# Altium PCB RP_INTERFACE_BOARD_V4.1.PcbDoc
Units mm, origin at the board's own origin, x right, y up, seen from the top; angles counter-clockwise.
Board outline 100 x 100 mm, 2 copper layers (Top Layer, Bottom Layer); 87 components, 97 nets, 300 pads, 89 vias.
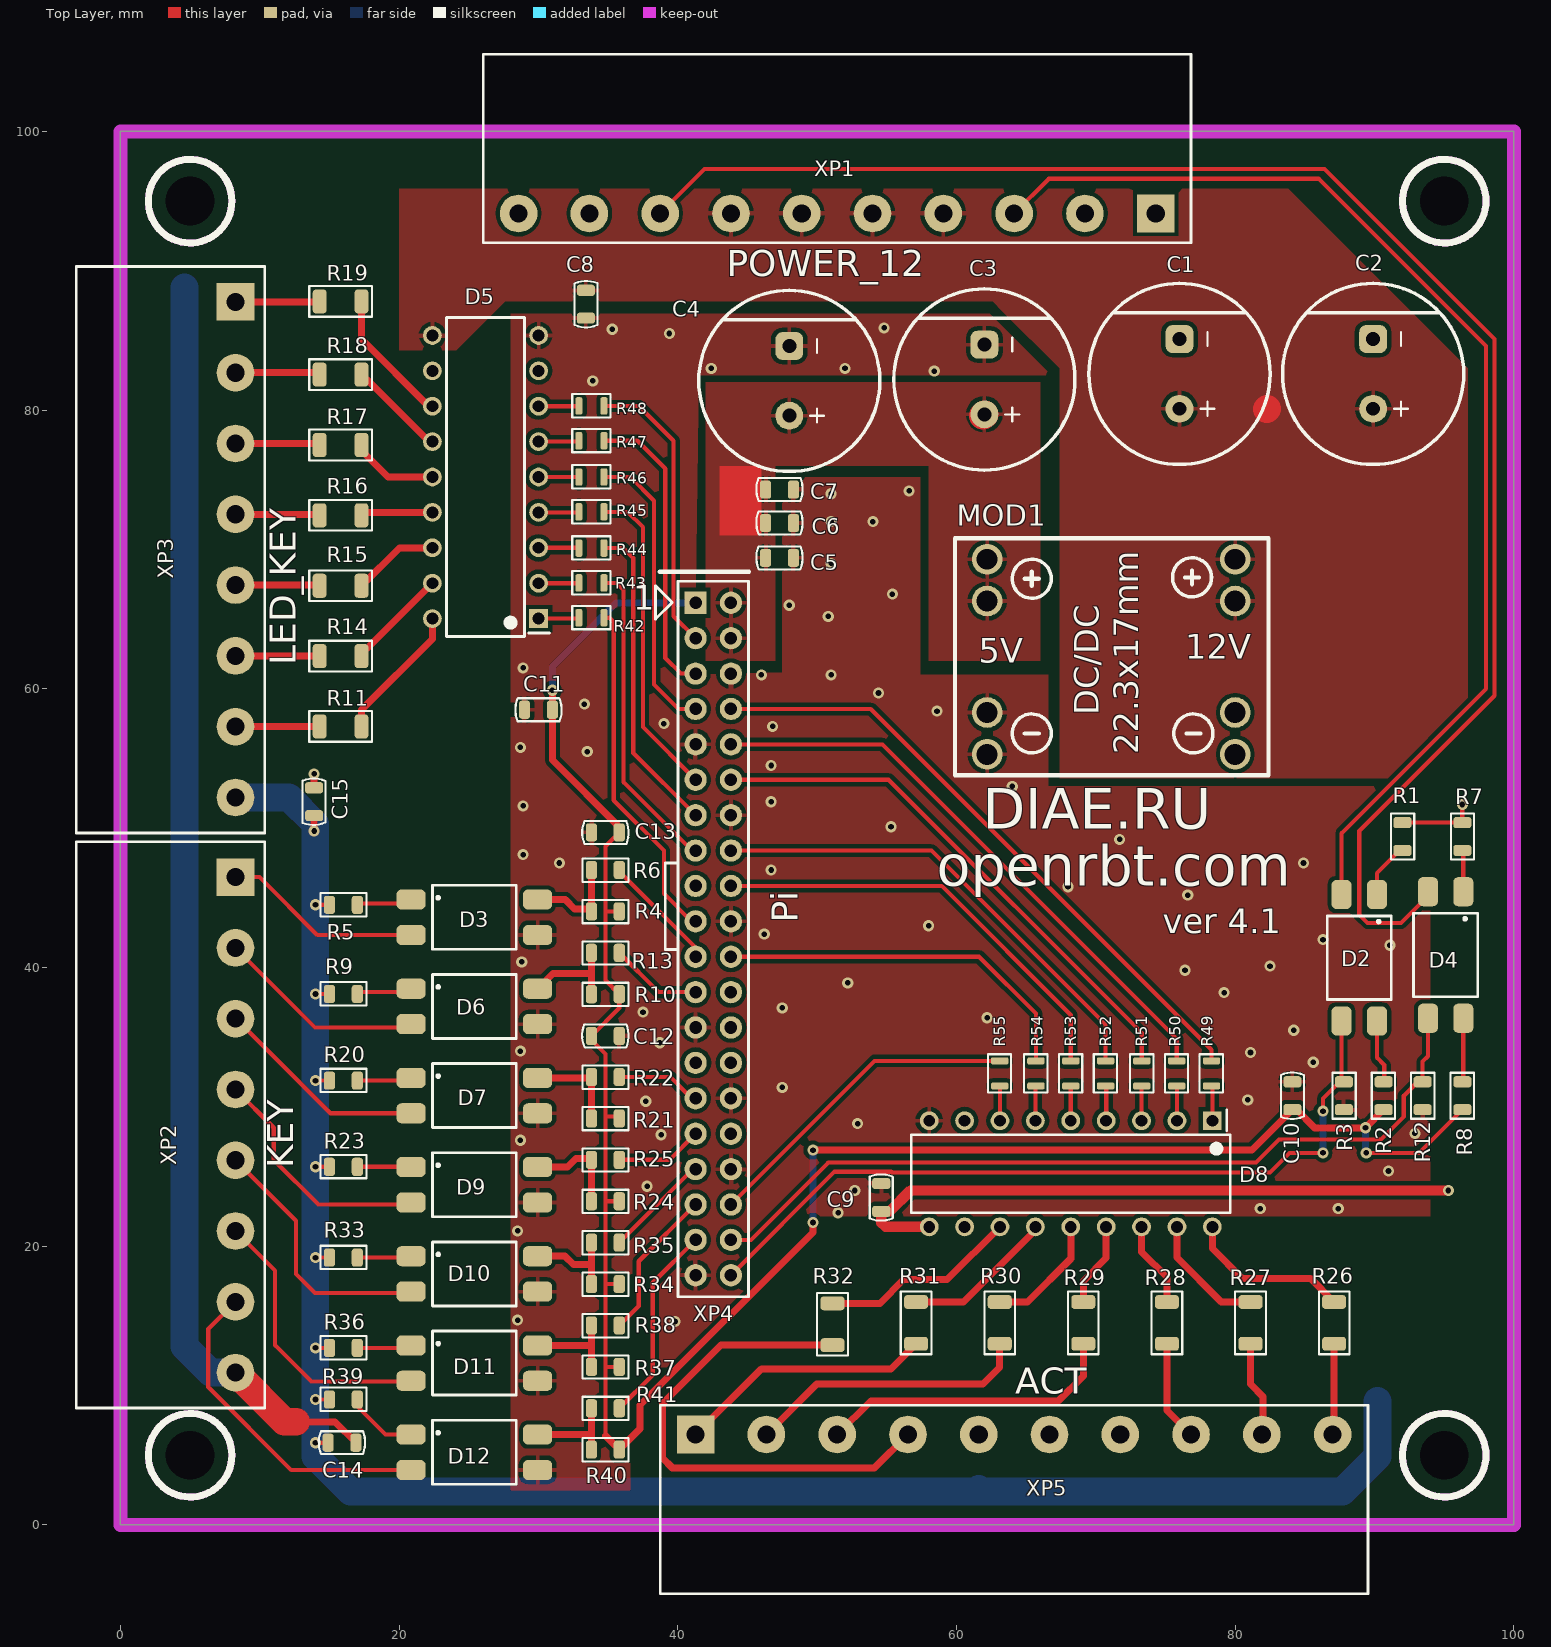
[diagram p0: Top Layer view]
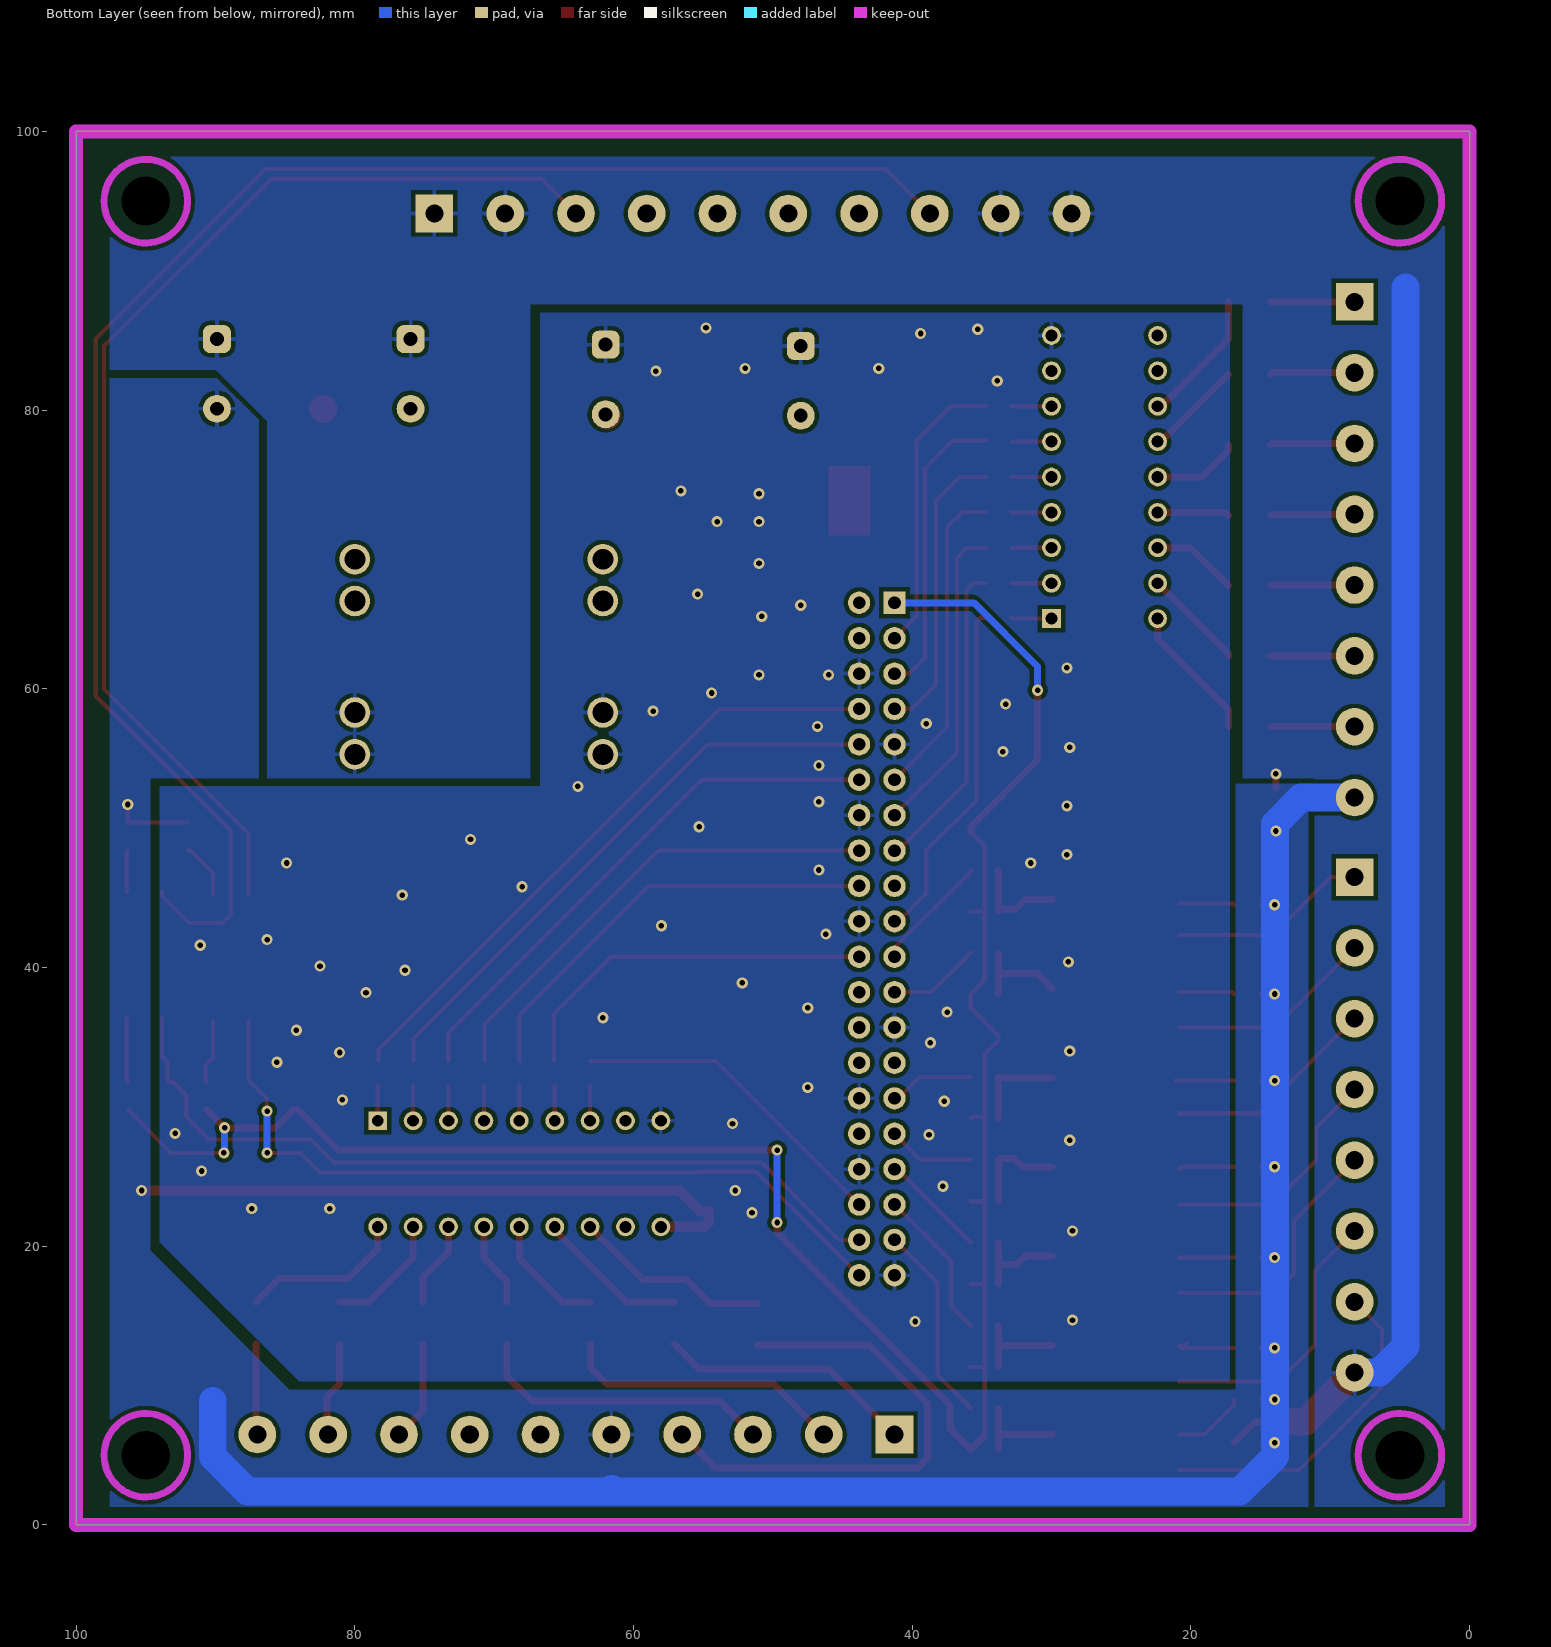
[diagram p1: Bottom Layer view, seen from below]
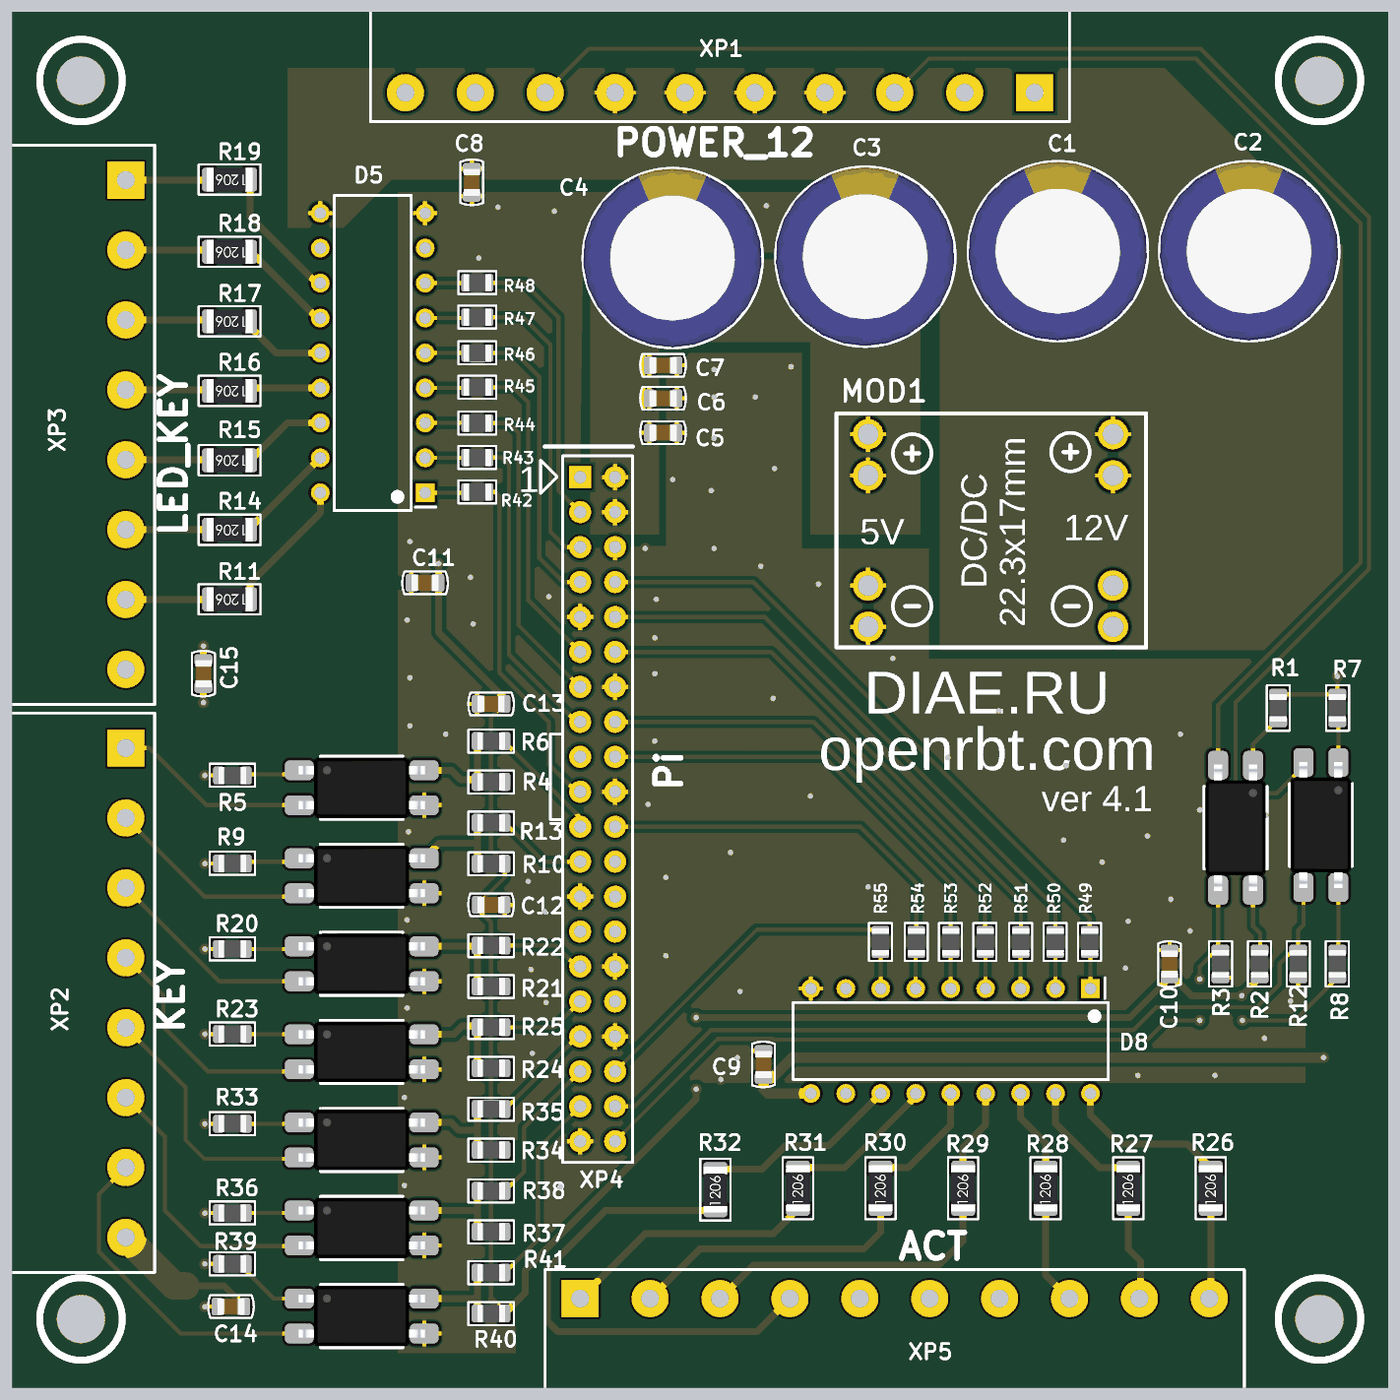
[diagram p2: 3D render of the assembled board from above, using the file's embedded part models]

## Layer stack, top to bottom
Top Solder: solder mask 0.0102, Solder Resist, Dk 3.5
Top Layer: signal copper 0.0356
Dielectric 1: dielectric 0.32, FR-4, Dk 4.8
Bottom Layer: signal copper 0.0356
Bottom Solder: solder mask 0.0102, Solder Resist, Dk 3.5

## Board outline
0,0 100,0 100,100 0,100

## Design rules (kind name [scope] priority, off if disabled: settings)
Clearance [All] p1: gap=0.3
ComponentClearance [All] p1 off: gap=0.254 collisioncheckmode=3 verticalgap=0.254 showdistances=FALSE
Height [All] p1: minheight=0 maxheight=60 prefheight=12.7
HoleSize [All] p1: absolutevalues=TRUE maxlimit=5 minlimit=0.025 maxpercent=80.000 minpercent=20.000
MinimumSolderMaskSliver [All] p1: minsoldermaskwidth=0.05
PlaneConnect [All] p1: planeconnectstyle=Relief reliefexpansion=0.5 reliefentries=4 reliefconductorwidth=0.25 reliefairgap=0.25
PolygonConnect PolygonConnect_via [isvia] p1: connectstyle=Direct reliefconductorwidth=0.254 reliefentries=4 polygonreliefangle="90 Angle" airgapwidth=0.254
PolygonConnect PolygonConnect_all [All] p2: connectstyle=Relief reliefconductorwidth=0.3 reliefentries=4 polygonreliefangle="90 Angle" airgapwidth=0.3
RoomDefinition RP_INTERFACE_BOARD_V4.1 [InComponentClass('RP_INTERFACE_BOARD_V4.1')] p1 off: confinementstyle=ConfineIn formatcopy=TRUE lockcomponents=FALSE outline -170.874,-119.814 -120.074,-119.814 -120.074,-94.414 -170.874,-94.414
RoutingVias [All] p1: holewidth=0.4 width=0.8 viastyle="Through Hole" minholewidth=0.4 minwidth=0.8 maxholewidth=1 maxwidth=2
SilkToSilkClearance [All] p1 off: silktosilkclearance=0.1
SilkToSolderMaskClearance [IsPad] p1: minsilkscreentomaskgap=0.075 clearancetoexposedcopper=TRUE
SolderMaskExpansion [All] p1: expansion=0.203
Width [All] p1: maxlimit=5 minlimit=0.2 preferedwidth=0.2
23 further rules are at their usual default settings.

## Components (designator, comment, footprint, x,y, rotation, side; value= is the part's Value field where it differs from the comment)
C1 "EXR102M25B" "RADIAL 13X25" 76,82.6 r270 top
C2 "EXR102M25B" "RADIAL 13X25" 89.9,82.6 r270 top
C3 "EXR102M25B" "RADIAL 13X25" 62,82.2 r270 top
C4 "EXR102M25B" "RADIAL 13X25" 48,82.1 r270 top
C5 "C0805, 1uF, 50V, X7R" C0805 47.3,69.4 r0 top
C6 "C0805, 1uF, 50V, X7R" C0805 47.3,71.9 r0 top
C7 "C0805, 1uF, 50V, X7R" C0805 47.3,74.3 r0 top
C8 "C0805, 1uF, 50V, X7R" C0805 33.4,87.6 r270 top
C9 "C0805, 1uF, 50V, X7R" C0805 54.6,23.5 r90 top
C10 "C0805, 1uF, 50V, X7R" C0805 84.1,30.8 r90 top
C11 "C0805, 1uF, 50V, X7R" C0805 30,58.5 r180 top
C12 "C0805, 1uF, 50V, X7R" C0805 34.803,35.089 r0 top
C13 "C0805, 1uF, 50V, X7R" C0805 34.8,49.7 r180 top
C14 "C0805, 1uF, 50V, X7R" C0805 15.9,5.9 r0 top
C15 "C0805, 1uF, 50V, X7R" C0805 13.9,51.9 r90 top
D2 "LTV-817S-TA1-C" SOIC4 88.9,40.7 r270 top
D3 "LTV-817S-TA1-C" SOIC4 25.4,43.608 r0 top
D4 "LTV-817S-TA1-C" SOIC4 95.1,40.9 r270 top
D5 "ULN2803A" DIP18_DIP762W46P254L2286H533Q18P#1 26.2,75.2 r180 top
D6 "LTV-817S-TA1-C" SOIC4 25.4,37.209 r0 top
D7 "LTV-817S-TA1-C" SOIC4 25.4,30.81 r0 top
D8 "ULN2803A" DIP18_DIP762W46P254L2286H533Q18P#2 68.2,25.2 r270 top
D9 "LTV-817S-TA1-C" SOIC4 25.4,24.412 r0 top
D10 "LTV-817S-TA1-C" SOIC4 25.4,18.013 r0 top
D11 "LTV-817S-TA1-C" SOIC4 25.4,11.614 r0 top
D12 "LTV-817S-TA1-C" SOIC4 25.4,5.215 r0 top
MOD1 "DC/DC module 5V 3A 22.3x17mm" "DC_DC_MODULE 5V, 17X22.3MM" 71.1,62.3 r0 top
R1 "R0805, 4.7k, 5%" R0805#1 92,49.4 r270 top
R2 "R0805, 1k, 5%" R0805#1 90.65,30.8 r90 top
R3 "R0805, 10k, 5%" R0805#1 87.8,30.8 r270 top
R4 "R0805, 4.7k, 5%" R0805#1 34.8,44.029 r180 top
R5 "R0805, 4.7k, 5%" R0805#1 16,44.5 r0 top
R6 "R0805, 1k, 5%" R0805#1 34.8,47 r180 top
R7 "R0805, 4.7k, 5%" R0805#1 96.3,49.4 r270 top
R8 "R0805, 1k, 5%" R0805#1 96.3,30.8 r90 top
R9 "R0805, 4.7k, 5%" R0805#1 16,38.1 r0 top
R10 "R0805, 4.7k, 5%" R0805#1 34.8,38.086 r180 top
R11 "R1206, 220R, 5%" R1206 15.8,57.3 r180 top
R12 "R0805, 10k, 5%" R0805#1 93.45,30.8 r270 top
R13 "R0805, 1k, 5%" R0805#1 34.8,41.057 r180 top
R14 "R1206, 220R, 5%" R1206 15.8,62.35 r180 top
R15 "R1206, 220R, 5%" R1206 15.8,67.4 r180 top
R16 "R1206, 220R, 5%" R1206 15.8,72.45 r180 top
R17 "R1206, 220R, 5%" R1206 15.8,77.5 r180 top
R18 "R1206, 220R, 5%" R1206 15.8,82.55 r180 top
R19 "R1206, 220R, 5%" R1206 15.8,87.8 r180 top
R20 "R0805, 4.7k, 5%" R0805#1 16,31.885 r0 top
R21 "R0805, 4.7k, 5%" R0805#1 34.8,29.171 r180 top
R22 "R0805, 1k, 5%" R0805#1 34.8,32.143 r180 top
R23 "R0805, 4.7k, 5%" R0805#1 16,25.7 r0 top
R24 "R0805, 4.7k, 5%" R0805#1 34.8,23.229 r180 top
R25 "R0805, 1k, 5%" R0805#1 34.8,26.2 r180 top
R26 "R1206, 10R, 5%" R1206 87.1,14.5 r90 top
R27 "R1206, 10R, 5%" R1206 81.1,14.5 r90 top
R28 "R1206, 10R, 5%" R1206 75.1,14.5 r90 top
R29 "R1206, 10R, 5%" R1206 69.1,14.5 r90 top
R30 "R1206, 10R, 5%" R1206 63.1,14.5 r90 top
R31 "R1206, 10R, 5%" R1206 57.1,14.5 r90 top
R32 "R1206, 10R, 5%" R1206 51.1,14.4 r90 top
R33 "R0805, 4.7k, 5%" R0805#1 16,19.185 r0 top
R34 "R0805, 4.7k, 5%" R0805#1 34.8,17.286 r180 top
R35 "R0805, 1k, 5%" R0805#1 34.8,20.257 r180 top
R36 "R0805, 4.7k, 5%" R0805#1 16,12.7 r0 top
R37 "R0805, 4.7k, 5%" R0805#1 34.8,11.343 r180 top
R38 "R0805, 1k, 5%" R0805#1 34.8,14.314 r180 top
R39 "R0805, 4.7k, 5%" R0805#1 16,9 r0 top
R40 "R0805, 4.7k, 5%" R0805#1 34.8,5.4 r180 top
R41 "R0805, 1k, 5%" R0805#1 34.8,8.371 r180 top
R42 "R0805, 1k, 5%" R0805#2 33.8,65.1 r0 top
R43 "R0805, 1k, 5%" R0805#2 33.8,67.6 r0 top
R44 "R0805, 1k, 5%" R0805#2 33.8,70.1 r0 top
R45 "R0805, 1k, 5%" R0805#2 33.8,72.7 r0 top
R46 "R0805, 1k, 5%" R0805#2 33.8,75.2 r0 top
R47 "R0805, 1k, 5%" R0805#2 33.8,77.8 r0 top
R48 "R0805, 1k, 5%" R0805#2 33.8,80.3 r0 top
R49 "R0805, 1k, 5%" R0805#2 78.3,32.4 r90 top
R50 "R0805, 1k, 5%" R0805#2 75.8,32.4 r90 top
R51 "R0805, 1k, 5%" R0805#2 73.3,32.4 r90 top
R52 "R0805, 1k, 5%" R0805#2 70.7,32.4 r90 top
R53 "R0805, 1k, 5%" R0805#2 68.2,32.4 r90 top
R54 "R0805, 1k, 5%" R0805#2 65.7,32.4 r90 top
R55 "R0805, 1k, 5%" R0805#2 63.1,32.4 r90 top
XP1 "EX2EDG-5.08-10" 5P08-10N 74.295,94.115 r180 top
XP2 "EX2EDG-5.08-8" 5P08-8N 8.255,46.49 r270 top
XP3 "EX2EDG-5.08-8" 5P08-8N 8.255,87.765 r270 top locked
XP4 "PLD-40" PLD-40 41.275,66.175 r270 top
XP5 "EX2EDG-5.08-10" 5P08-10N 41.275,6.485 r0 top

## Footprints (in the part's own frame and the unit in brackets; to place one, negate y for a bottom-side part, rotate by r counter-clockwise, add the part's x,y. Pads: shape width x height; smd on the part's side, far side on the other; paste and mask are expansions set on the pad)
5P08-8N [mm]
  rect 2.7x2.7 hole 1.3 mask+0.15: 1(0,0)
  round 2.7 hole 1.3 mask+0.15: 2(5.08,0) 3(10.16,0) 4(15.24,0) 5(20.32,0) 6(25.4,0) 7(30.48,0) 8(35.56,0)
  silkscreen extent -2.54,-11.43 38.1,2.1
5P08-10N [mm]
  rect 2.7x2.7 hole 1.3 mask+0.15: 1(0,0)
  round 2.7 hole 1.3 mask+0.15: 2(5.08,0) 3(10.16,0) 4(15.24,0) 5(20.32,0) 6(25.4,0) 7(30.48,0) 8(35.56,0) 9(40.64,0) 10(45.72,0)
  silkscreen extent -2.54,-11.43 48.26,2.1
C0805 [mm]
  rrect50% 0.8x1.3 smd: 1(-1,0) 2(1,0)
  silkscreen extent -1.67,-0.82 1.66,0.82, body extent -1,-0.6 1,0.6, height 1.2
"DC_DC_MODULE 5V, 17X22.3MM" [mm]
  round 2.2 hole 1.5: 1(-8.9,7) 2(-8.9,4) 3(-8.9,-4) 4(-8.9,-7) 5(8.9,-7) 6(8.9,-4) 7(8.9,4) 8(8.9,7)
  silkscreen extent -11.2,-8.5 11.3,8.5
DIP18_DIP762W46P254L2286H533Q18P#1 [mm]
  rect 1.35x1.35 / inner round 0 / far side rect 1.35x1.35 hole 0.849 mask+0.2: 1(-3.81,10.16)
  round 1.35 / inner round 0 / far side round 1.35 hole 0.849 mask+0.2: 2(-3.81,7.62) 3(-3.81,5.08) 4(-3.81,2.54) 5(-3.81,0) 6(-3.81,-2.54) 7(-3.81,-5.08) 8(-3.81,-7.62) 9(-3.81,-10.16) 10(3.81,-10.16) 11(3.81,-7.62) 12(3.81,-5.08) 13(3.81,-2.54) 14(3.81,0) 15(3.81,2.54) 16(3.81,5.08) 17(3.81,7.62) 18(3.81,10.16)
  silkscreen extent -4.6,-11.45 2.8,11.45
DIP18_DIP762W46P254L2286H533Q18P#2 [mm]
  rect 1.35x1.35 / inner round 1.524 / far side rect 1.35x1.35 hole 0.849 mask+0.2: 1(-3.81,10.16)
  round 1.35 / inner round 1.524 / far side round 1.35 hole 0.849 mask+0.2: 2(-3.81,7.62) 3(-3.81,5.08) 4(-3.81,2.54) 5(-3.81,0) 6(-3.81,-2.54) 7(-3.81,-5.08) 8(-3.81,-7.62) 9(-3.81,-10.16) 10(3.81,-10.16) 11(3.81,-7.62) 12(3.81,-5.08) 13(3.81,-2.54) 14(3.81,0) 15(3.81,2.54) 16(3.81,5.08) 17(3.81,7.62) 18(3.81,10.16)
  silkscreen extent -4.6,-11.45 2.8,11.45
PLD-40 [mm]
  rect 1.6x1.6 / inner round 0 / far side rect 1.6x1.6 hole 0.9 mask+0.15: 1(0,0)
  round 1.6 / inner round 0 / far side round 1.6 hole 0.9 mask+0.15: 2(0,2.54) 3(2.54,0) 4(2.54,2.54) 5(5.08,0) 6(5.08,2.54) 7(7.62,0) 8(7.62,2.54) 9(10.16,0) 10(10.16,2.54) 11(12.7,0) 12(12.7,2.54) 13(15.24,0) 14(15.24,2.54) 15(17.78,0) 16(17.78,2.54) 17(20.32,0) 18(20.32,2.54) 19(22.86,0) 20(22.86,2.54) 21(25.4,0) 22(25.4,2.54) 23(27.94,0) 24(27.94,2.54) 25(30.48,0) 26(30.48,2.54) 27(33.02,0) 28(33.02,2.54) 29(35.56,0) 30(35.56,2.54) 31(38.1,0) 32(38.1,2.54) 33(40.64,0) 34(40.64,2.54) 35(43.18,0) 36(43.18,2.54) 37(45.72,0) 38(45.72,2.54) 39(48.26,0) 40(48.26,2.54)
  silkscreen extent -1.55,-1.27 49.8,3.81
R0805#1 [mm]
  rrect50% 0.8x1.3 smd: 1(-1,0) 2(1,0)
  silkscreen extent -1.65,-0.82 1.65,0.85, body extent -1,-0.63 1,0.63, height 0.47
R0805#2 [mm]
  rrect50% 0.5x1.25 smd: 1(-0.9,0) 2(0.9,0)
  silkscreen extent -1.38,-0.82 1.38,0.85, body extent -1,-0.63 1,0.63, height 0.47
R1206 [mm]
  rrect50% 1x1.73 smd: 1(-1.5,0) 2(1.5,0)
  silkscreen extent -2.25,-1.1 2.25,1.1, body extent -1.67,-0.86 1.68,0.87, height 0.85
"RADIAL 13X25" [mm]
  rrect50% 2x2 hole 1: 1(-2.5,0)
  round 2 hole 1: 2(2.5,0)
  silkscreen extent -6.5,-6.5 6.5,6.5, body extent -6.5,-6.52 6.5,6.48, height 27.1
SOIC4 [mm]
  rrect50% 2.09x1.44 smd: 1(-4.54,1.27) 2(-4.54,-1.27) 3(4.54,-1.27) 4(4.54,1.27)
  silkscreen extent -3,-2.3 3,2.3, body extent -4.59,-2.19 4.59,2.2, height 2.2

## Part data
C1 C2 C3 C4: "1000uF 25V 13x21mm"
D2 D3 D4 D6 D7 D9 D10 D11 D12: "Optoisolator Transistor Output 5000Vrms 1 Channel 4-SMD"
D5 D8: "Eight Darlington array, DIP-18"
XP1 XP5: library part EX2EDG-5_0.08-10
XP4: "PLD-40, вилка штыревая 2.54мм 2x20 прямая"

## Free pads (board coordinates)
  round 0 hole 3.5: 0(5,5) 0(5,95) 0(95,5) 0(95,95)

## Via types
v1: diameter 0.8, hole 0.4, Top Layer to Bottom Layer, tented both sides, 89 vias

## Nets (pads, with @x,y where several pads share a name; then routed paths per layer and width w, separated by ;. In a path a pad name is that pad's centre, name@x,y a point inside that pad or via, vN(x,y) a via of type N, cw(c..) or ccw(c..) an arc to the next point about the centre after c; other vN are vias at no path point)
0V: C1.1 C2.1 C14.2 C15.2 MOD1.5 MOD1.6 XP1.1 XP1.2 XP1.9 XP1.10 XP2.8 | length 92.2
  Top Layer w0.5: 12.6,7.4 15.4,7.4 C14.2 ; C15.2 v1(13.9,53.9)
  Top Layer w2: XP2.8 11.785,7.4 12.6,7.4
  Bottom Layer w2: 4.6,88.8 4.6,12.8 6.47,10.93 XP2.8
+3V3: C10.1 C11.1 C12.1 C13.1 R2.1 R4.1 R8.1 R10.1 R21.1 R24.1 R34.1 R37.1 R40.1 XP4.1 | length 158.4
  Top Layer w0.3: 34.8,6.4 34.8,11.4 ; R37.1 34.857,11.343 34.8,11.4 ; R34.1 34.814,17.286 34.8,17.3 ; R24.1 34.829,23.229 34.8,23.2 ; R21.1 35.671,29.3 34.8,29.3 ; R4.1 34.829,44.029 34.8,44 ; C13.1 34.8,48.7 34.8,44 ; v1(89.4,26.7) 93.2,26.7 R8.1 ; 34.8,11.4 34.8,17.3 ; 34.8,17.3 34.8,23.2 ; 34.8,23.2 34.8,29.3 ; 34.8,29.3 34.8,33.8 33.803,34.797 C12.1 35.8,37.086 R10.1 34.8,39.086 34.8,44
  Top Layer w0.5: v1(31,59.9) C11.1 31,54.9 35.8,50.1 C13.1 ; 34.8,6.4 R40.1 37.3,6.9 37.3,8.6 49.7,21 v1(49.7,21.7) ; v1(49.7,26.9) 81.2,26.9 C10.1 84.4,29.8 85.7,28.5 v1(89.35,28.5) R2.1
  Bottom Layer w0.5: v1(31,59.9) 31,61.6 35.575,66.175 XP4.1 ; v1(49.7,21.7) v1(49.7,26.9) ; v1(89.35,28.5) 89.35,26.75 v1(89.4,26.7)
+5V: C3.2 C4.2 C5.1 C6.1 C7.1 MOD1.1 MOD1.2 XP4.2 XP4.4 | length 0.1
  Top Layer w2: C3.2@61.9,79.6 C3.2
+12V: C1.2 C2.2 C8.1 C9.1 C14.1 C15.1 D5.10 D8.10 MOD1.7 MOD1.8 R1.1 R5.1 R7.1 R9.1 R20.1 R23.1 R33.1 R36.1 R39.1 XP1.4 XP1.5 XP1.6 XP1.7 XP3.8 XP5.5 | length 194.6
  Top Layer w0.3: v1(14,5.9) C14.1 ; v1(14,9) R39.1 ; v1(14,12.7) R36.1 ; v1(14,19.185) R33.1 ; v1(14,25.7) R23.1 ; v1(14,31.885) R20.1 ; v1(14,38.1) R9.1 ; v1(14,44.5) R5.1 ; R1.1 R7.1 v1(96.3,51.7)
  Top Layer w0.5: v1(13.9,49.8) C15.1
  Top Layer w0.75: C9.1 54.6,21.7 54.91,21.39 D8.10 ; C9.1@55,22.5 55.2,22.5 56.7,24 v1(95.3,24)
  Top Layer w2: XP1.4@59.055,93.945 XP1.4 ; 82.26,80.06 82.3,80.1
  Bottom Layer w2: XP3.8 10.595,52.205 12.095,52.205 13.979,50.321 13.979,4.921 16.5,2.4 61.4,2.4 ; 61.595,2.595 61.4,2.4 ; 90.2,8.9 90.2,4.9 87.7,2.4 61.4,2.4
GND: C3.1 C4.1 C5.2 C6.2 C7.2 C8.2 C9.2 C10.2 C11.2 C12.2 C13.2 D3.3 D5.9 D6.3 D7.3 D8.9 D9.3 D10.3 D11.3 D12.3 MOD1.3 MOD1.4 R3.2 R12.2 XP4.6 XP4.9 XP4.14 XP4.20 XP4.25 XP4.30 XP4.34 XP4.39
  other v1: 39.8,14.6 28.5,14.7 28.5,21.1 51.5,22.4 81.8,22.7 87.4,22.7 52.7,24 37.8,24.3 91,25.4 28.7,27.6 38.8,28 92.9,28.1 52.9,28.8 37.7,30.4 80.9,30.5 47.5,31.4 85.6,33.2 81.1,33.9 28.7,34 38.7,34.6 84.2,35.5 62.2,36.4 37.5,36.8 47.5,37.1 79.2,38.2 52.2,38.9 76.4,39.8 82.5,40.1 28.8,40.4 91.1,41.6 86.3,42 46.2,42.4 58,43 76.6,45.2 68,45.8 46.7,47 31.5,47.5 84.9,47.5 28.9,48.1 71.7,49.2 55.3,50.1 28.9,51.6 46.7,51.9 64,53 46.7,54.5 33.5,55.5 28.7,55.8 46.8,57.3 39,57.5 58.6,58.4 33.3,58.9 54.4,59.7 46,61 51,61 28.9,61.5 50.8,65.2 48,66 55.4,66.8 51,69 51,72 54,72 51,74 56.6,74.2 33.9,82.1 58.4,82.8 42.4,83 52,83 39.4,85.5 35.3,85.8 54.8,85.9
KEY_1: D3.2 XP2.1 | length 14.3
  Top Layer w0.3: XP2.1 9.97,46.49 14.122,42.338 D3.2
KEY_2: D6.2 XP2.2 | length 15
  Top Layer w0.3: XP2.2 13.97,35.695 D6.2@20.86,35.695
KEY_3: D7.2 XP2.3 | length 15.4
  Top Layer w0.3: XP2.3 8.28,36.33 15.07,29.54 D7.2
KEY_4: D9.2 XP2.4 | length 17.4
  Top Layer w0.3: XP2.4 11,28.505 11,26.2 14.205,22.995 D9.2@20.86,22.995
KEY_5: D10.2 XP2.5 | length 18.8
  Top Layer w0.3: XP2.5 12.6,21.825 12.6,18 13.955,16.645 D10.2@20.86,16.645
KEY_6: D11.2 XP2.6 | length 20.2
  Top Layer w0.3: XP2.6 11.1,18.245 11.1,12.9 13.705,10.295 D11.2@20.86,10.295
KEY_7: D12.2 XP2.7 | length 24
  Top Layer w0.3: XP2.7@8.295,16.05 XP2.7 6.3,14.055 6.3,9.9 12.255,3.945 D12.2
KEY_38: D4.2 XP1.8 | length 117.9
  Top Layer w0.3: XP1.8@38.735,94.085 XP1.8 41.92,97.3 86.4,97.3 98.6,85.1 98.6,59.5 88.9,49.8 88.9,43.8 89.5,43.2 91.9,43.2 93.83,45.13 D4.2
KEY_40: D2.2 XP1.3 | length 83.5
  Top Layer w0.3: XP1.3 66.62,96.6 86,96.6 98,84.6 98,60 87.63,49.63 D2.2
LED_1: R19.2 XP3.1 | length 6.1
  Top Layer w0.5: XP3.1 14.265,87.765 R19.2
LED_2: R18.2 XP3.2 | length 6.1
  Top Layer w0.5: XP3.2 14.165,82.685 R18.2
LED_3: R17.2 XP3.3 | length 6.1
  Top Layer w0.5: XP3.3 14.195,77.605 R17.2
LED_4: R16.2 XP3.4 | length 6.1
  Top Layer w0.5: XP3.4 14.225,72.525 R16.2
LED_5: R15.2 XP3.5 | length 6.1
  Top Layer w0.5: XP3.5 14.255,67.445 R15.2
LED_6: R14.2 XP3.6 | length 6.1
  Top Layer w0.5: XP3.6 14.285,62.365 R14.2
LED_7: R11.2 XP3.7 | length 6.1
  Top Layer w0.5: XP3.7 14.285,57.285 R11.2
NetD2_1: D2.1 R1.2 | length 4
  Top Layer w0.3: D2.1 90.17,46.77 91.8,48.4 R1.2
NetD2_4: D2.4 R2.2 | length 4.6
  Top Layer w0.3: D2.4 90.17,33.53 90.7,33 90.7,31.85 R2.2
NetD3_1: D3.1 R5.2 | length 4
  Top Layer w0.3: R5.2@16.9,44.5 16.985,44.585 D3.1@20.86,44.585
NetD3_4: D3.4 R4.2 R6.2 | length 7.2
  Top Layer w0.5: D3.4 31.922,44.878 32.6,44.2 33.629,44.2 R4.2 R6.2
NetD4_1: D4.1 R7.2 | length 3
  Top Layer w0.3: R7.2 96.37,48.33 D4.1
NetD4_4: D4.4 R8.2 | length 4.6
  Top Layer w0.3: R8.2 96.37,31.87 D4.4
NetD5_1: D5.1 R42.1 | length 2.9
  Top Layer w0.3: D5.1 32.84,65.04 R42.1
NetD5_2: D5.2 R43.1 | length 2.9
  Top Layer w0.3: D5.2 32.88,67.58 R43.1
NetD5_3: D5.3 R44.1 | length 2.9
  Top Layer w0.3: D5.3 R44.1@32.88,70.12
NetD5_4: D5.4 R45.1 | length 2.9
  Top Layer w0.3: D5.4 32.86,72.66 R45.1
NetD5_5: D5.5 R46.1 | length 2.9
  Top Layer w0.3: D5.5 R46.1
NetD5_6: D5.6 R47.1 | length 2.8
  Top Layer w0.3: D5.6 R47.1@32.84,77.74
NetD5_7: D5.7 R48.1 | length 2.9
  Top Layer w0.3: D5.7 32.88,80.28 R48.1
NetD5_12: D5.12 R19.1 | length 9.8
  Top Layer w0.5: R19.1 17.3,85.1 22.12,80.28 D5.12
NetD5_13: D5.13 R18.1 | length 7.1
  Top Layer w0.5: R18.1 17.35,82.55 22.16,77.74 D5.13
NetD5_14: D5.14 R17.1 | length 6.3
  Top Layer w0.5: R17.1 17.3,77.1 19.2,75.2 D5.14
NetD5_15: D5.15 R16.1 | length 5.2
  Top Layer w0.5: R16.1 17.51,72.66 D5.15
NetD5_16: D5.16 R15.1 | length 6.2
  Top Layer w0.5: R15.1 20.02,70.12 D5.16
NetD5_17: D5.17 R14.1 | length 7.3
  Top Layer w0.5: R14.1 17.3,62.49 D5.17
NetD5_18: D5.18 R11.1 | length 9.8
  Top Layer w0.5: R11.1 17.3,58.5 22.39,63.59 D5.18
NetD6_1: D6.1 R9.2 | length 4
  Top Layer w0.3: R9.2@16.9,38.1 17.035,38.235 D6.1@20.86,38.235
NetD6_4: D6.4 R10.2 R13.2 | length 7.3
  Top Layer w0.5: D6.4 31.032,39.571 33.8,39.571 ; R10.2 33.8,39.571 ; R13.2 33.8,39.571
NetD7_1: D7.1 R20.2 | length 4.5
  Top Layer w0.3: R20.2@16.9,31.885 D7.1@20.515,31.885 ; D7.1@21.1,31.885 D7.1@20.86,31.885 ; D7.1@20.515,31.885 D7.1@20.86,31.885 ; D7.1@20.515,31.885 D7.1@20.86,31.885
NetD7_4: D7.4 R21.2 R22.2 | length 6.9
  Top Layer w0.5: D7.4 33.738,32.08 R22.2 R21.2
NetD8_1: D8.1 R49.1 | length 2.5
  Top Layer w0.3: R49.1 78.36,31.44 D8.1
NetD8_2: D8.2 R50.1 | length 2.5
  Top Layer w0.3: R50.1 75.82,31.48 D8.2
NetD8_3: D8.3 R51.1 | length 2.5
  Top Layer w0.3: D8.3 73.28,31.48 R51.1
NetD8_4: D8.4 R52.1 | length 2.5
  Top Layer w0.3: R52.1 70.74,31.46 D8.4
NetD8_5: D8.5 R53.1 | length 2.5
  Top Layer w0.3: D8.5 R53.1
NetD8_6: D8.6 R54.1 | length 2.5
  Top Layer w0.3: D8.6 65.66,31.46 R54.1
NetD8_7: D8.7 R55.1 | length 2.5
  Top Layer w0.3: R55.1 63.12,31.48 D8.7
NetD8_12: D8.12 R32.2 | length 14.3
  Top Layer w0.5: R32.2 54.5,15.9 56.2,17.6 59.33,17.6 D8.12
NetD8_13: D8.13 R31.2 | length 10.9
  Top Layer w0.5: R31.2 60.5,16 65.66,21.16 D8.13
NetD8_14: D8.14 R30.2 | length 8.7
  Top Layer w0.5: R30.2 65.1,16 68.2,19.1 D8.14
NetD8_15: D8.15 R29.2 | length 6.1
  Top Layer w0.5: R29.2 69.1,17.5 70.74,19.14 D8.15
NetD8_16: D8.16 R28.2 | length 6.1
  Top Layer w0.5: D8.16 73.28,19.6 75.1,17.78 R28.2
NetD8_17: D8.17 R27.2 | length 8.8
  Top Layer w0.5: D8.17 75.82,19.18 79,16 R27.2
NetD8_18: D8.18 R26.2 | length 11.9
  Top Layer w0.5: D8.18 78.36,19.84 80.5,17.7 85.4,17.7 R26.2
NetD9_1: D9.1 R23.2 | length 4
  Top Layer w0.3: R23.2@16.9,25.7 20.695,25.7 D9.1@20.86,25.535
NetD9_4: D9.4 R24.2 R25.2 | length 7.1
  Top Layer w0.5: D9.4 32.082,25.682 32.7,26.3 33.7,26.3 R25.2 R24.2
NetD10_1: D10.1 R33.2 | length 5.6
  Top Layer w0.3: R33.2@16.9,19.185 20.86,19.185 19.215,19.185
NetD10_4: D10.4 R34.2 R35.2 | length 7.1
  Top Layer w0.5: D10.4 31.917,19.283 32.5,18.7 33.7,18.7 33.8,18.6 ; R34.2 33.8,18.6 ; R35.2 33.8,18.6
NetD11_1: D11.1 R36.2 | length 4.7
  Top Layer w0.3: R36.2@16.9,12.7 20.725,12.7 20.86,12.835 20.3,12.835 D11.1@20.3,13
NetD11_4: D11.4 R37.2 R38.2 | length 6.8
  Top Layer w0.5: D11.4 33.784,12.884 33.8,12.9 ; R37.2 33.8,12.9 ; R38.2 33.8,12.9
NetD12_1: D12.1 R39.2 | length 5.2
  Top Layer w0.3: R39.2@16.9,9 16.9,8.6 19.015,6.485 D12.1
NetD12_4: D12.4 R40.2 R41.2 | length 6.8
  Top Layer w0.5: D12.4 33.785,6.485 33.8,6.5 ; R40.2 33.8,6.5 ; R41.2 33.8,6.5
NetR26_1: R26.1 XP5.10 | length 6.4
  Top Layer w0.5: XP5.10@87.1,6.59 R26.1
NetR27_1: R27.1 XP5.9 | length 6.9
  Top Layer w0.5: R27.1 81.1,10.1 82,9.2 82,6.57 XP5.9
NetR28_1: R28.1 XP5.8 | length 7.2
  Top Layer w0.5: R28.1 75.1,8.22 XP5.8
NetR29_1: R29.1 XP5.3 | length 21.7
  Top Layer w0.5: XP5.3 53.85,8.9 67.3,8.9 69.1,10.7 R29.1
NetR30_1: R30.1 XP5.2 | length 20.4
  Top Layer w0.5: XP5.2 49.97,10.1 61.9,10.1 63.1,11.3 R30.1
NetR31_1: R31.1 XP5.1 | length 18.5
  Top Layer w0.5: XP5.1 45.99,11.2 55.3,11.2 R31.1
NetR32_1: R32.1 XP5.4 | length 36.7
  Top Layer w0.5: R32.1 43.1,12.9 38.9,8.7 38.9,4.8 39.6,4.1 54.13,4.1 XP5.4
R_ACT_1: R49.2 XP4.8 | length 45.4
  Top Layer w0.3: XP4.8 53.845,58.555 78.3,34.1 R49.2
R_ACT_2: R50.2 XP4.10 | length 42.3
  Top Layer w0.3: XP4.10 54.685,56.015 75.8,34.9 R50.2
R_ACT_3: R51.2 XP4.12 | length 39
  Top Layer w0.3: XP4.12@43.82,53.48 XP4.12 55.125,53.475 73.3,35.3 R51.2
R_ACT_4: R52.2 XP4.16 | length 34.7
  Top Layer w0.3: XP4.16 58.205,48.395 70.7,35.9 R52.2
R_ACT_5: R53.2 XP4.18 | length 31.5
  Top Layer w0.3: XP4.18 58.945,45.855 68.2,36.6 R53.2
R_ACT_6: R54.2 XP4.22 | length 27
  Top Layer w0.3: XP4.22 61.625,40.775 65.7,36.7 R54.2
R_ACT_7: R55.2 XP4.36 | length 23.6
  Top Layer w0.3: XP4.36 54.12,33.3 R55.2
R_KEY_1: R6.1 XP4.21 | length 8.5
  Top Layer w0.3: R6.1 35.8,46.9 41.275,41.425 XP4.21
R_KEY_2: R13.1 XP4.23 | length 6.6
  Top Layer w0.3: R13.1 38.622,38.235 XP4.23
R_KEY_3: R22.1 XP4.29 | length 6.1
  Top Layer w0.3: R22.1 39.472,32.143 41,30.615 XP4.29
R_KEY_4: R25.1 XP4.31 | length 6.3
  Top Layer w0.3: R25.1 39.4,26.2 XP4.31
R_KEY_5: R35.1 XP4.33 | length 7.7
  Top Layer w0.3: R35.1 41.078,25.535 XP4.33
R_KEY_6: R38.1 XP4.35 | length 10.9
  Top Layer w0.3: R38.1 37.2,15.714 37.2,18.92 XP4.35
R_KEY_7: R41.1 XP4.37 | length 14.4
  Top Layer w0.3: R41.1 38.2,10.771 38.2,17.38 XP4.37
R_KEY_38: D4.3 R12.1 XP4.38 | length 59.9
  Top Layer w0.3: XP4.38 45.255,20.455 50.8,26 81.5,26 83.15,27.65 90.45,27.65 92.1,29.3 92.1,30.8 93.1,31.8 R12.1 93.45,33.25 93.83,33.63 D4.3
R_KEY_40: D2.3 R3.1 XP4.40 | length 56.2
  Top Layer w0.3: XP4.40 51.25,25.35 55.319,25.35 55.369,25.3 82.5,25.3 83.9,26.7 v1(86.3,26.7) ; v1(86.3,29.7) 86.3,30.6 87.63,31.93 D2.3
  Bottom Layer w0.5: v1(86.3,26.7) v1(86.3,29.7)
R_LED_1: R48.2 XP4.3 | length 20.9
  Top Layer w0.3: R48.2 37.2,80.3 39.7,77.8 39.7,65.21 XP4.3
R_LED_2: R47.2 XP4.5 | length 21.5
  Top Layer w0.3: R47.2 37.1,77.8 39.1,75.8 39.1,62.21 40.215,61.095 XP4.5
R_LED_3: R46.2 XP4.7 | length 21.2
  Top Layer w0.3: R46.2 36.6,75.2 38.3,73.5 38.3,60.31 40.055,58.555 XP4.7
R_LED_4: R45.2 XP4.11 | length 22.9
  Top Layer w0.3: R45.2 36.4,72.7 37.5,71.6 37.5,57.25 XP4.11
R_LED_5: R44.2 XP4.13 | length 22.7
  Top Layer w0.3: R44.2 36.1,70.1 36.8,69.4 36.8,55.4 41.265,50.935 XP4.13
R_LED_6: R43.2 XP4.15 | length 22.6
  Top Layer w0.3: R43.2 35.6,67.6 36.1,67.1 36.1,53.3 41.005,48.395 XP4.15 XP4.15@41.265,48.395
R_LED_7: R42.2 XP4.19 | length 24.9
  Top Layer w0.3: R42.2 35.1,65.1 35.4,64.8 35.4,52 39,48.4 39,45.3 40.985,43.315 XP4.19
pads on no net: D5.8 D5.11 D8.8 D8.11 XP4.17 XP4.24 XP4.26 XP4.27 XP4.28 XP4.32 XP5.6 XP5.7

## Polygon pours and split planes (outlines as drawn)
GND on Bottom Layer "Bottom Layer, Bottom-No Net" (solid, remove dead copper, pour order 31): 17.2,87 66.7,87 66.7,53 94,53 94,20.3 84,10.3 52,10.3 20.6,10.3 17.2,10.3
0V on Bottom Layer "Bottom Layer, Bottom-No Net" (solid, remove dead copper, pour order 37): 1.8,98.2 97.6,98.2 97.6,82.9 90,82.9 88.6,81.5 86.3,79.2 86.3,53.6 67.4,53.6 67.4,87.6 64.1,87.6 16.3,87.6 16.3,77.8 16.3,53.6 11.1,53.6 11.1,1.3 1.8,1.3 1.8,15.5 1.8,15.8 1.8,16.1
+12V on Bottom Layer "Bottom Layer, Bottom-No Net" (solid, remove dead copper, pour order 39): 16.8,53.2 16.8,9.7 26.6,9.7 84.7,9.7 94.7,19.7 94.7,25.6 94.7,48.6 94.7,53.6 86.9,53.6 86.9,61.4 86.9,79.3 89.9,82.3 93.4,82.3 97.6,82.3 97.6,1.3 83.3,1.3 11.6,1.3 11.6,14.3 11.6,53.2
+5V on Top Layer "Bottom Layer, Bottom-No Net" (solid, pour order 41): 66,62 66,82 42,82 42,76 42,62 47,62 47,76 52,76 58,76 58,62
GND on Top Layer "Bottom Layer, Bottom-No Net" (solid, remove dead copper, pour order 33): 28,61 28,86.9 41.2,86.9 62.4,86.9 66.8,82.5 41.494,82.5 41.2,61 47.5,61.197 47.5,75.2 57.4,75.2 57.4,61 66.6,61 66.6,53 94,53 94,22.15 88,22.15 48.35,22.15 44.9,18.7 44.9,15.5 40.7,11.3 36.6,11.3 36.6,2.5 35.2,2.5 28,2.5
+12V on Top Layer "Bottom Layer, Bottom-No Net" (solid, remove dead copper, pour order 35): 43,95.9 83.8,95.9 96.7,83 96.7,53.6 67.4,53.6 67.4,83 63.3,87.1 62.6,87.8 40.5,87.8 29.7,87.8 27.6,87.8 25.4,85.6 24.1,84.3 21.4,84.3 20,84.3 20,89 20,95.9 33.4,95.9

## Keep-outs
Keep-Out Layer:
  circle w0.5: c5,95 r3
  circle w0.5: c95,95 r3
  circle w0.5: c95,5 r3
  circle w0.5: c5,5 r3
  lines w1: 0,0 100,0 100,100 0,100 0,0

## Other copper
Top Layer:
  rectangle net +5V: 43,71 46,76

## Silkscreen, mask and mechanical layers (free items; w line width, h text height)
Top Overlay:
  circle w0.5: c95,5 r3
  circle w0.5: c5,5 r3
  circle w0.5: c95,95 r3
  circle w0.5: c5,95 r3
  lines w0.2: 38.4,65 38.4,67.4 39.6,66.2 38.4,65 ; 39.1,41.3 40,41.3 40,47.5 39.1,47.5 39.1,41.3
  lines w0.3: 38.7,68.4 45.1,68.4
  text "POWER_12" at 43.5,89.6 h1.88
  text "1" at 36.8,65.1 h3
  text "LED_KEY" at 12.6,61.7 h1.88 r90
  text "DIAE.RU" at 61.9,49 h5
  text "openrbt.com" at 58.6,44.9 h5
  text "Pi" at 48.6,43.2 h1.88 r90
  text "ver 4.1" at 74.8,41.9 h3
  text "KEY" at 12.4,25.6 h1.88 r90
  text "ACT" at 64.2,9.4 h1.88
Mechanical 4:
  the board outline again, w1

## Text inside footprints (layer, text, board x,y; h text height)
MOD1: Top Overlay "DC/DC" at 70.8,58.1 h3 r90; Top Overlay "22.3x17mm" at 73.6,55.3 h3 r90; Top Overlay "12V" at 76.4,61.6 h3; Top Overlay "5V" at 61.6,61.3 h3